# Altium PCB dummy_planes.PcbDoc
Units mm, origin at the board's own origin, x right, y up, seen from the top; angles counter-clockwise.
Board outline 46.99 x 28.07 mm, 4 copper layers (Top Layer, InternalPlane1, InternalPlane2, Bottom Layer); 50 components, 48 nets, 191 pads, 37 vias.
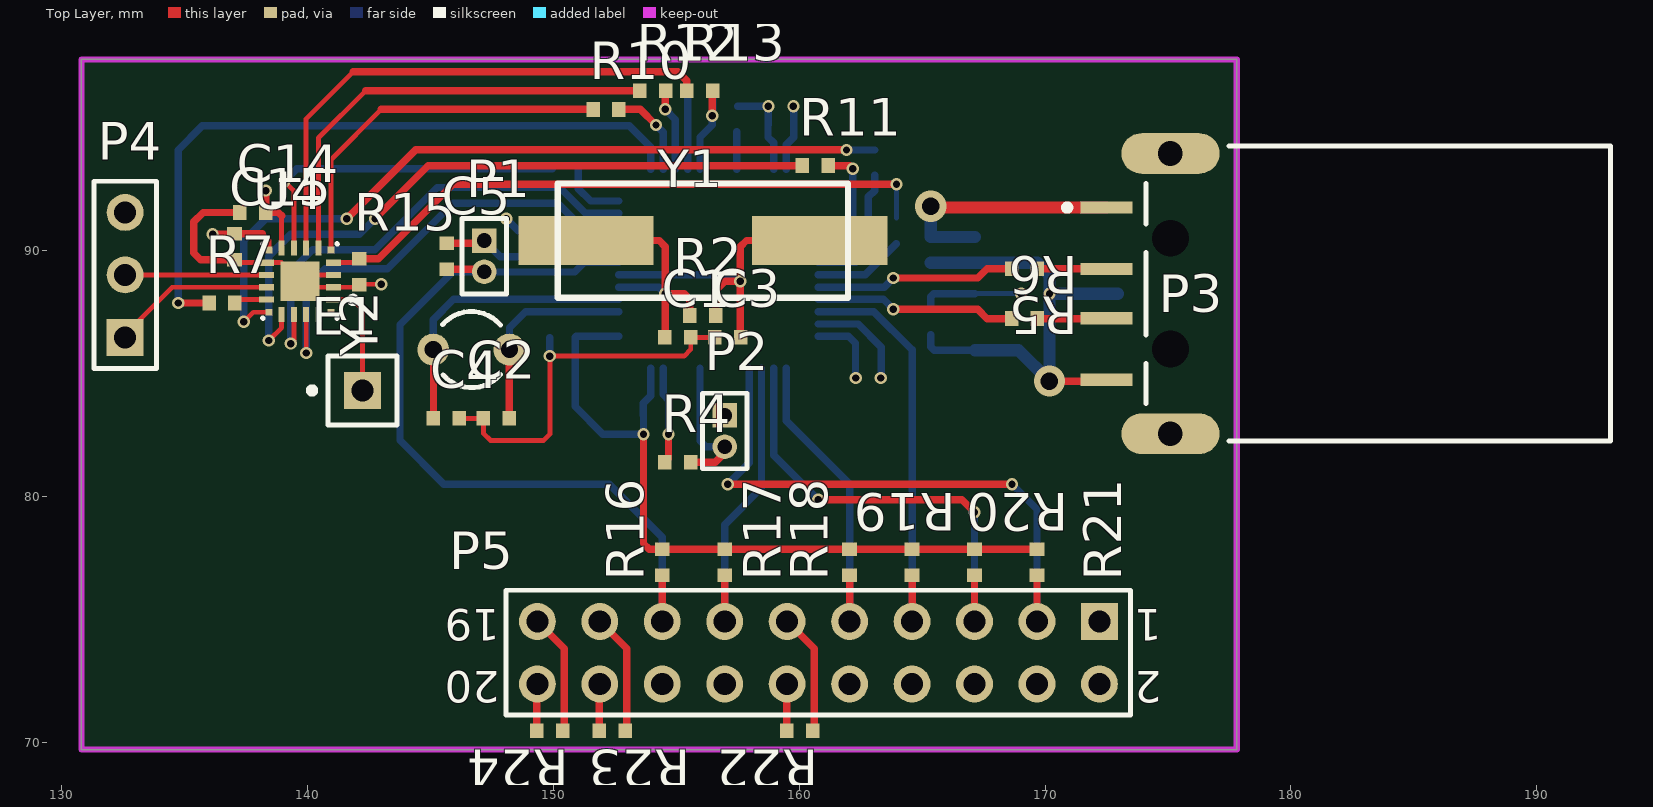
[diagram p0: Top Layer view]
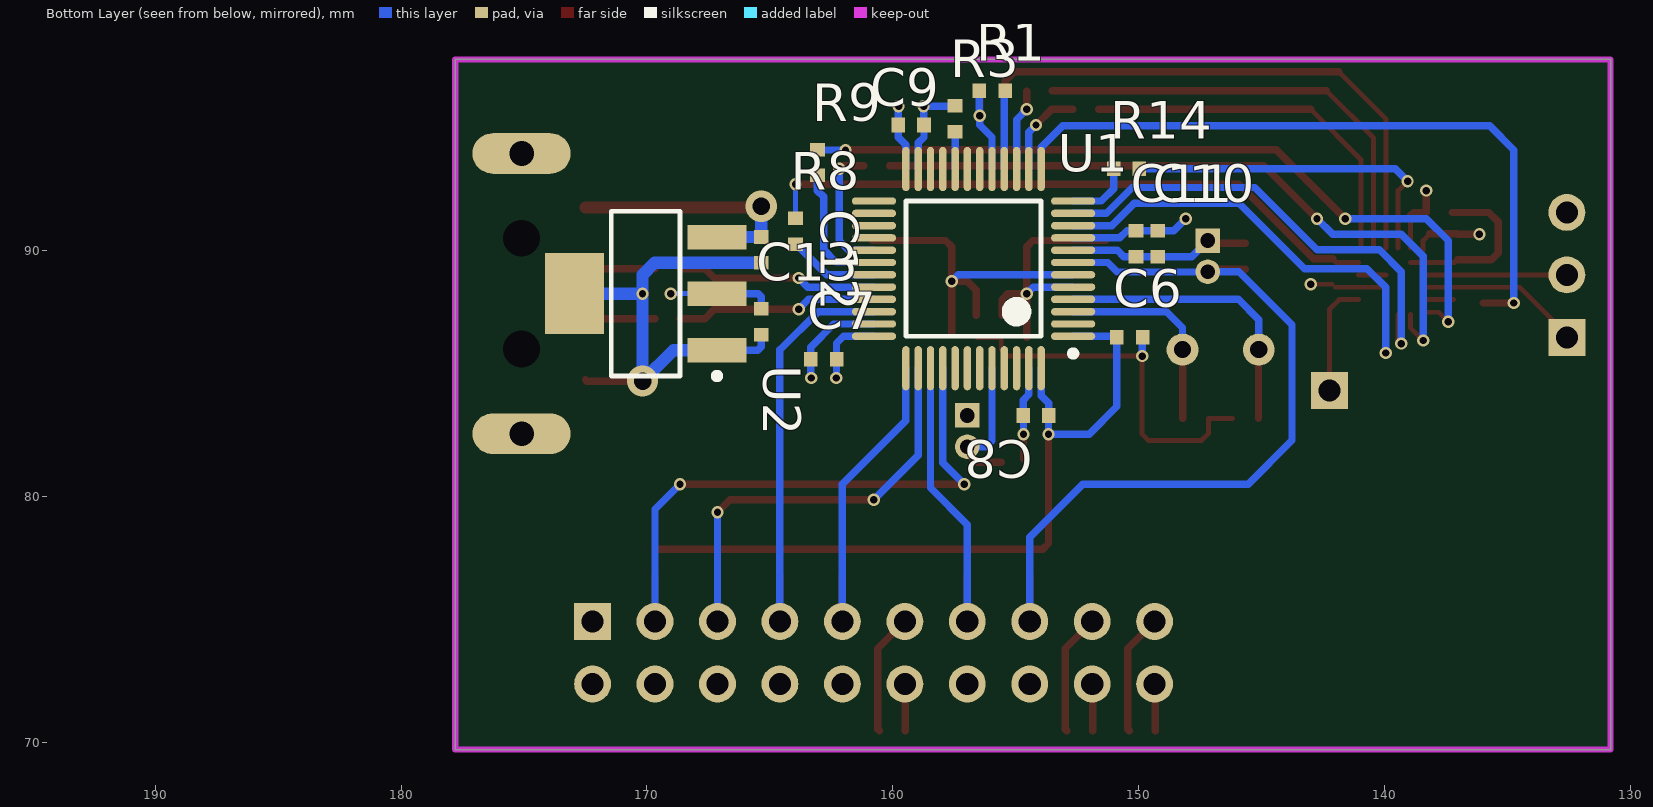
[diagram p1: Bottom Layer view, seen from below]
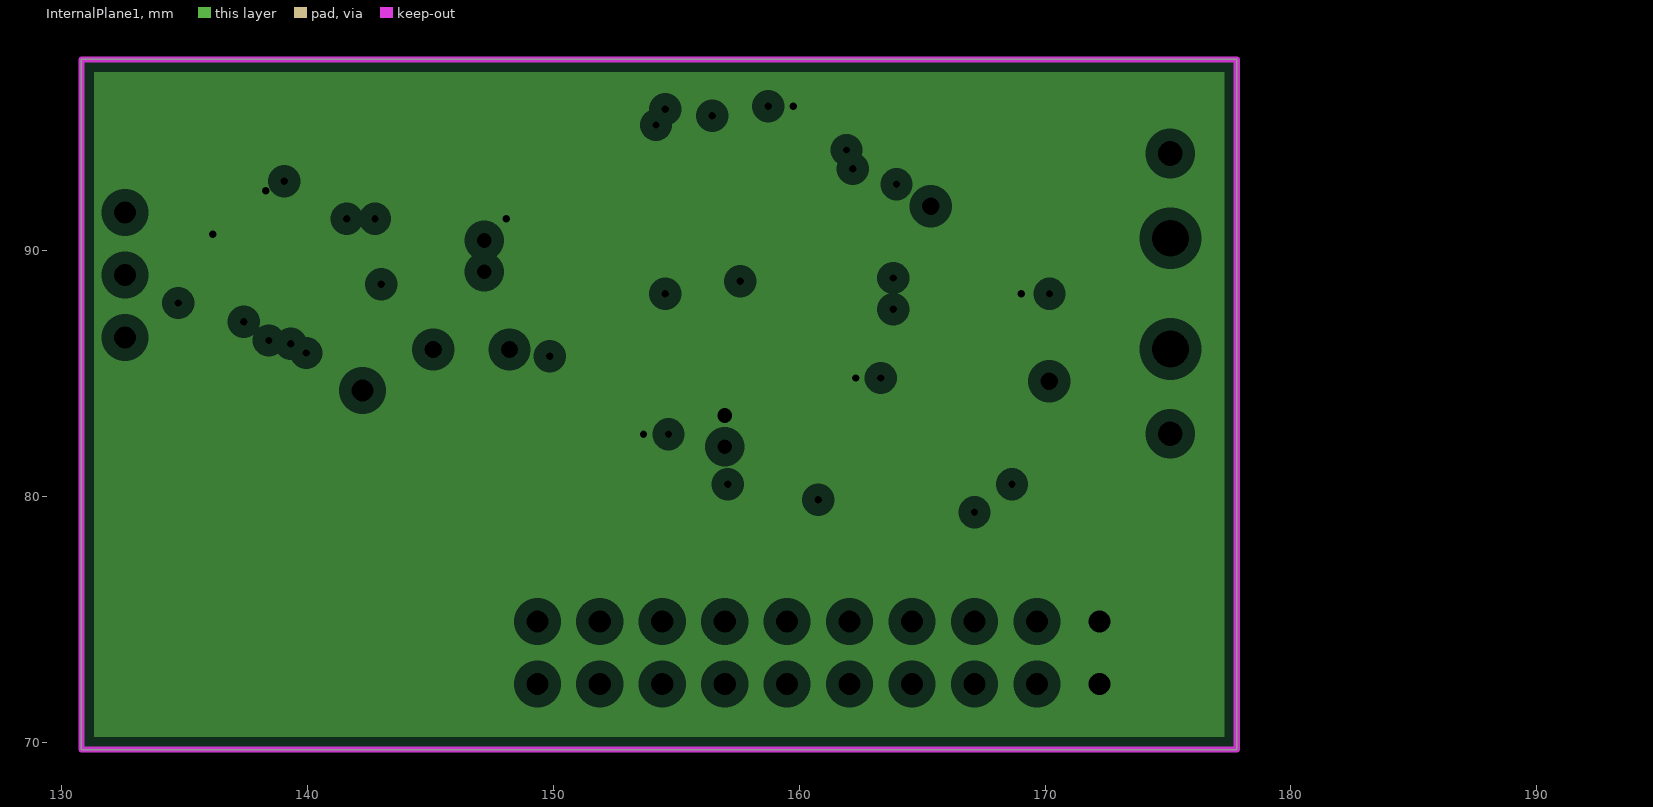
[diagram p2: InternalPlane1, clearances drawn from the general rule]
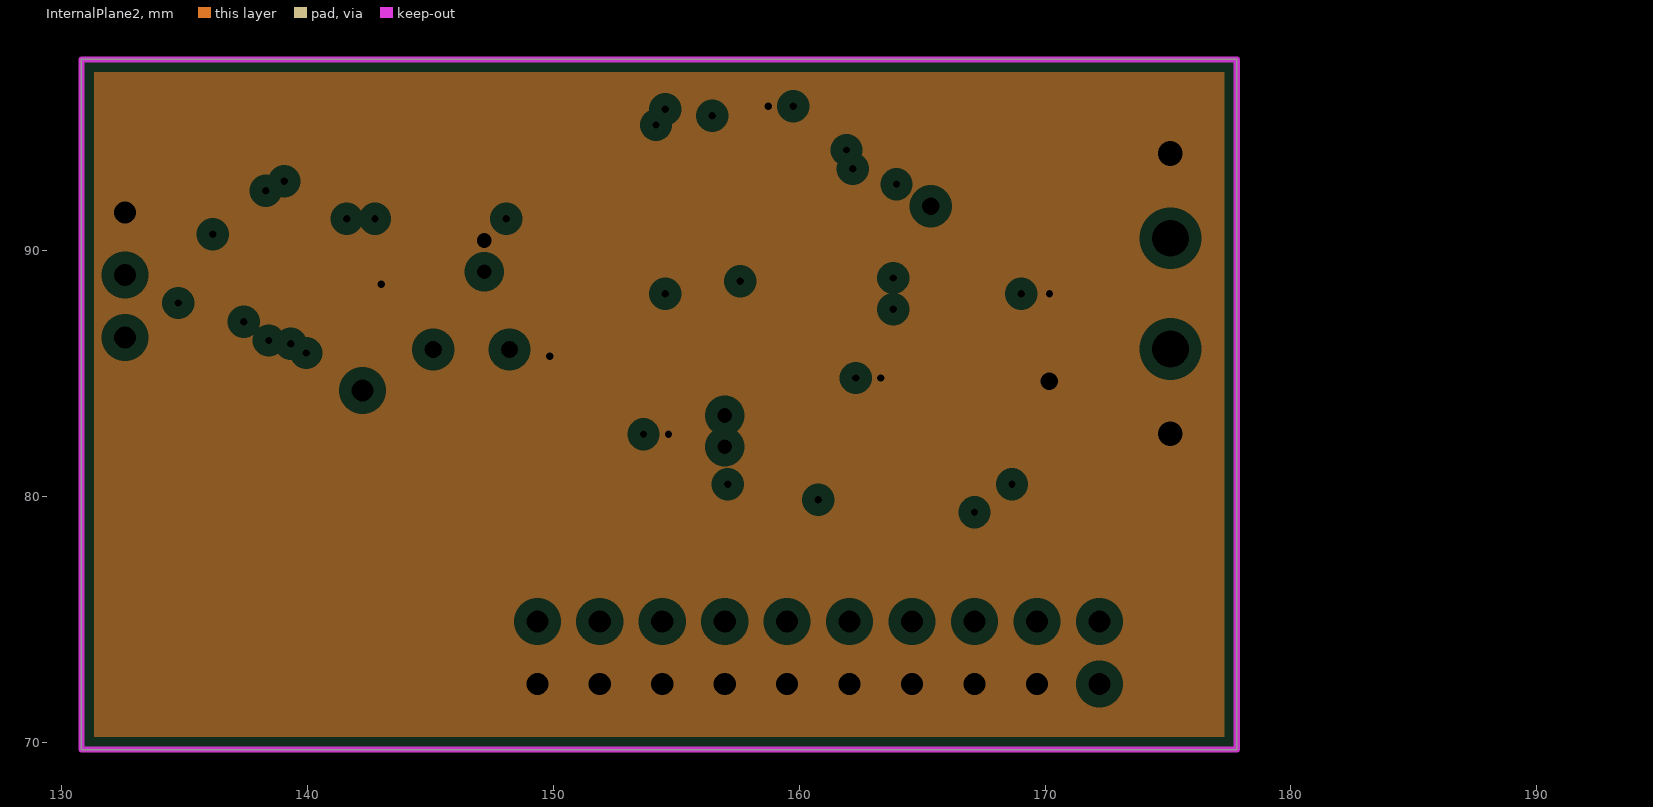
[diagram p3: InternalPlane2, clearances drawn from the general rule]

## Layer stack, top to bottom
Top Layer: signal copper 0.0356
Dielectric: core 0.32, FR-4, Dk 4.8
InternalPlane1: plane copper 0.0356, net +3.3V
Dielectric: prepreg 0.32, FR-4, Dk 4.8
InternalPlane2: plane copper 0.0356, net GND
Dielectric: core 0.32, FR-4, Dk 4.8
Bottom Layer: signal copper 0.0356

## Board outline
130.81,69.723 130.81,97.79 177.8,97.79 177.8,69.723

## Design rules (kind name [scope] priority, off if disabled: settings)
Clearance [All] p1: gap=0.2
DiffPairsRouting [All] p1: maxlimit=0.254 minlimit=0.254 mostfreqgap=0.254 maxuncoupledlength=12.7
PlaneClearance [All] p1: clearance=0.508
PlaneConnect [All] p1: planeconnectstyle=Relief reliefexpansion=0.508 reliefentries=4 reliefconductorwidth=0.3 reliefairgap=0.254
PolygonConnect [All] p1: connectstyle=Relief reliefconductorwidth=0.3 reliefentries=4 polygonreliefangle="90 Angle"
RoutingVias [All] p1: holewidth=0.711 width=1.27 viastyle="Through Hole" minholewidth=0.711 minwidth=1.27 maxholewidth=0.711 maxwidth=1.27
SilkscreenOverComponentPads [All] p1: minsilkscreentomaskgap=0.254
SolderMaskExpansion [All] p1: expansion=0.102
Width [All] p1: maxlimit=0.5 minlimit=0.2 preferedwidth=0.3 minimp=50.000000 maximp=50.000000 favimp=50.000000
24 further rules are at their usual default settings.

## Classes and differential pairs
component class usb_connector: C12 C13 P3 R5 R6 U2
component class jtag_connector: P5 R16 R17 R18 R19 R20 R21 R22 R23 R24
component class hole_field_direct: C14 C15 E1 P4 R7 R8 R9 R10 R11 R12 R13 R14 R15 U4
component class core: C1 C2 C3 C4 C5 C6 C7 C8 C9 C10 C11 P1 P2 R1 R2 R3 R4 U1 Y1 Y2
differential pair USB_D: +USB_D_P -USB_D_N

## Components (designator, comment, footprint, x,y, rotation, side; value= is the part's Value field where it differs from the comment)
C1 "27pF" CHIP0402#1 155.067,86.487 r180 top
C2 "10pF" CHIP0402#1 147.684,83.194 r0 top
C3 "27pF" CHIP0402#1 157.099,86.487 r180 top
C4 "10pF" CHIP0402#1 145.652,83.194 r180 top
C5 "100nF" CHIP0402#1 145.669,89.789 r90 top
C6 "100nF" CHIP0402#1 150.368,86.487 r180 bottom
C7 "100nF" CHIP0402#1 162.814,85.598 r0 bottom
C8 "100nF" CHIP0402#1 154.178,83.312 r0 bottom
C9 "100nF" CHIP0402#1 159.258,95.123 r180 bottom
C10 "100nF" CHIP0402#1 149.225,90.297 r90 bottom
C11 "1uF" CHIP0402#1 150.114,90.297 r90 bottom
C12 "Cap" CHIP0402#2 165.354,90.043 r90 bottom
C13 "Cap" CHIP0402#2 165.354,87.122 r90 bottom
C14 "100nF" CHIP0402#2 137.778,91.567 r180 top
C15 "22nF" CHIP0402#2 137.033,90.17 r90 top
E1 "Antenna" PIN1 142.24,84.328 r90 top
P1 "Reset pins" MHDR1X2 147.193,90.424 r270 top
P2 "Boot pins" MHDR1X2 156.972,83.312 r270 top
P3 "1470695-2" 1470695A 177.8,88.265 r0 top
P4 "Header 3" HDR1X3 132.588,86.487 r90 top
P5 "Header 10X2" HDR2X10 172.212,74.93 r180 top
R1 "47k" CHIP0402#1 155.956,96.52 r180 bottom
R2 "1M" CHIP0402#1 156.083,87.376 r0 top
R3 "47k" CHIP0402#1 157.468,95.382 r90 bottom
R4 "47k" CHIP0402#1 155.067,81.407 r180 top
R5 "Res1" CHIP0402#2 169.164,89.281 r0 top
R6 "Res1" CHIP0402#2 169.164,87.249 r0 top
R7 "600" CHIP0402#2 136.525,87.884 r180 top
R8 "2k" CHIP0402#2 163.957,90.805 r90 bottom
R9 "2k" CHIP0402#2 163.068,93.599 r270 bottom
R10 "2k" CHIP0402#2 152.146,95.758 r180 top
R11 "2k" CHIP0402#2 160.655,93.472 r0 top
R12 "2k" CHIP0402#2 154.051,96.52 r180 top
R13 "2k" CHIP0402#2 155.956,96.52 r180 top
R14 "2k" CHIP0402#2 150.495,93.345 r180 bottom
R15 "47k" CHIP0402#2 142.113,89.154 r90 top
R16 "Res1" CHIP0402#2 154.432,77.343 r90 top
R17 "Res1" CHIP0402#2 156.972,77.343 r90 top
R18 "Res1" CHIP0402#2 162.052,77.343 r90 top
R19 "Res1" CHIP0402#2 164.592,77.343 r90 top
R20 "Res1" CHIP0402#2 167.132,77.343 r90 top
R21 "Res1" CHIP0402#2 169.672,77.343 r90 top
R22 "Res1" CHIP0402#2 160.02,70.485 r0 top
R23 "Res1" CHIP0402#2 152.4,70.485 r0 top
R24 "Res1" CHIP0402#2 149.86,70.485 r0 top
U1 "STM32F103C8T6" LQFP48_N 156.718,89.281 r0 bottom
U2 "LM1117IMP-3.3" MP04A_N 170.053,88.265 r0 bottom
U4 "Si4705" QFN50P300X300X60-20N 139.7,88.773 r180 top
Y1 "8Mhz" HC-49-SMD 156.083,90.424 r180 top
Y2 "32758" R38 146.668,85.988 r90 top

## Footprints (in the part's own frame and the unit in brackets; to place one, negate y for a bottom-side part, rotate by r counter-clockwise, add the part's x,y. Pads: shape width x height; smd on the part's side, far side on the other; paste and mask are expansions set on the pad)
1470695A [mm] "Connector; USB1.1, Type A, SM; 4 Position; Right Angle"
  rect 2.1x0.5 smd: 1(-5.3,3.5) 2(-5.3,1) 3(-5.3,-1) 4(-5.3,-3.5)
  oval 4x1.65 hole 1: 5(-2.7,-5.7) 6(-2.7,5.7)
  round 1.2 hole 1.5 unplated: MH1(-2.7,-2.25) MH2(-2.7,2.25)
  silkscreen extent -7.02,-6 15.2,6
CHIP0402#1 [mm] "Chip Resistor, 2-Leads, Body 1,0x0,5mm, IPC High Density"
  rect 0.55x0.6 smd: 1(0.525,0) 2(-0.525,0)
  body extent -0.5,-0.25 0.5,0.25, height 0.35
CHIP0402#2 [mm] "Chip Resistor, 2-Leads, Body 1,0x0,5mm, IPC High Density"
  rect 0.55x0.6 smd: 1(-0.525,0) 2(0.525,0)
  body extent -0.5,-0.25 0.5,0.25, height 0.35
HC-49-SMD [mm]
  rect 5.5x2 smd: 1(-4.75,0) 2(4.75,0)
  silkscreen extent -5.9,-2.33 5.9,2.33
HDR1X3 [mm] "Connector; Header; 3 Position"
  rect 1.5x1.5 hole 0.9: 1(0,0)
  round 1.5 hole 0.9: 2(2.54,0) 3(5.08,0)
  silkscreen extent -1.27,-1.27 6.35,1.27
HDR2X10 [mm] "Connector; Header; 10x2 Position"
  rect 1.5x1.5 hole 0.9: 1(0,0)
  round 1.5 hole 0.9: 2(0,2.54) 3(2.54,0) 4(2.54,2.54) 5(5.08,0) 6(5.08,2.54) 7(7.62,0) 8(7.62,2.54) 9(10.16,0) 10(10.16,2.54) 11(12.7,0) 12(12.7,2.54) 13(15.24,0) 14(15.24,2.54) 15(17.78,0) 16(17.78,2.54) 17(20.32,0) 18(20.32,2.54) 19(22.86,0) 20(22.86,2.54)
  silkscreen extent -1.27,-1.27 24.13,3.81
LQFP48_N [mm] "Thin QFP, 48-Leads, Body 7x7mm, Pitch 0.5mm, IPC Medium Density"
  oval 1.8x0.3 smd: 1(-4.05,2.75) 2(-4.05,2.25) 3(-4.05,1.75) 4(-4.05,1.25) 5(-4.05,0.75) 6(-4.05,0.25) 7(-4.05,-0.25) 8(-4.05,-0.75) 9(-4.05,-1.25) 10(-4.05,-1.75) 11(-4.05,-2.25) 12(-4.05,-2.75) 25(4.05,-2.75) 26(4.05,-2.25) 27(4.05,-1.75) 28(4.05,-1.25) 29(4.05,-0.75) 30(4.05,-0.25) 31(4.05,0.25) 32(4.05,0.75) 33(4.05,1.25) 34(4.05,1.75) 35(4.05,2.25) 36(4.05,2.75)
  oval 0.3x1.8 smd: 13(-2.75,-4.05) 14(-2.25,-4.05) 15(-1.75,-4.05) 16(-1.25,-4.05) 17(-0.75,-4.05) 18(-0.25,-4.05) 19(0.25,-4.05) 20(0.75,-4.05) 21(1.25,-4.05) 22(1.75,-4.05) 23(2.25,-4.05) 24(2.75,-4.05) 37(2.75,4.05) 38(2.25,4.05) 39(1.75,4.05) 40(1.25,4.05) 41(0.75,4.05) 42(0.25,4.05) 43(-0.25,4.05) 44(-0.75,4.05) 45(-1.25,4.05) 46(-1.75,4.05) 47(-2.25,4.05) 48(-2.75,4.05)
  silkscreen extent -4.17,-2.75 2.75,3.57, body extent -3.5,-3.5 3.5,3.5, height 1.6
MHDR1X2 [mm] "Connector; Header; 2 Position"
  rect 1x1 hole 0.6: 1(0,0)
  round 1 hole 0.6: 2(1.27,0)
  silkscreen extent -0.9,-0.9 2.17,0.9
MP04A_N [mm] "SOT223, 4-Leads, Body 6.5x3.5mm, Pitch 2.3mm, Lead Span 7mm, IPC Medium Density"
  rect 2.4x1 smd: 1(-2.9,2.3) 2(-2.9,0) 3(-2.9,-2.3)
  rect 2.4x3.3 smd: 4(2.9,0)
  silkscreen extent -3.02,-3.35 1.4,3.47, body extent -1.85,-3.35 1.85,3.35, height 1.8
PIN1 [mm] "Generic Antenna; 1 Lead"
  rect 1.5x1.5 hole 0.9: 1(0,0)
  silkscreen extent -1.4,-1.4 1.4,2.17
QFN50P300X300X60-20N [mm] "QFN, 20-Leads, Body 3,0x3,0mm (max), Pitch 0,50mm, IPC Medium Density"
  rect 1.6x1.6 smd: 0(0,0)
  rect 0.28x0.28 smd: 1(-1.265,1.265) 6(-1.265,-1.265) 11(1.265,-1.265) 16(1.265,1.265)
  rect 0.61x0.25 smd: 2(-1.355,0.75) 3(-1.355,0.25) 4(-1.355,-0.25) 5(-1.355,-0.75) 12(1.355,-0.75) 13(1.355,-0.25) 14(1.355,0.25) 15(1.355,0.75)
  rect 0.25x0.61 smd: 7(-0.75,-1.355) 8(-0.25,-1.355) 9(0.25,-1.355) 10(0.75,-1.355) 17(0.75,1.355) 18(0.25,1.355) 19(-0.25,1.355) 20(-0.75,1.355)
  silkscreen extent -2.28,-1.53 1.53,1.53, body extent -1.5,-1.5 1.5,1.5, height 0.6
R38 [mm] "Crystal, Thru-Hole; 2 Leads; Body 3.1 x 8.2 mm (Dia.xH)"
  round 1.3 hole 0.7: 1(0,1.55) 2(0,-1.55)
  silkscreen extent -1.55,-1.19 1.55,1.17

## Part data
C1 C2 C3 C4 C5 C6 C7 C8 C9 C10 C11 C14 C15: library part Cap, "Capacitor"
C12 C13: "Capacitor"
E1: "Generic Antenna"
P1 P2: library part MHDR1X2, "Header, 2-Pin"
P3: "USB 1.1, Right Angle, SMT, A Type, Plug, 4 Position, Natural"
P4: "Header, 3-Pin"
P5: "Header, 10-Pin, Dual row"
R1 R2 R3 R4 R7 R8 R9 R10 R11 R12 R13 R14 R15: library part Res1, "Resistor"
R5 R6 R16 R17 R18 R19 R20 R21 R22 R23 R24: "Resistor"
U1: "STM32 ARM-based 32-bit MCU with 64 Kbytes Flash, 48-pin LQFP, Industrial Temperature"
U2: "800mA Low-Dropout Linear Regulator"
Y1 Y2: library part HC-49-SMD

## Via types
v1: diameter 0.5, hole 0.3, Top Layer to Bottom Layer, 35 vias
v2: diameter 1.27, hole 0.711, Top Layer to Bottom Layer, 2 vias

## Nets (pads, with @x,y where several pads share a name; then routed paths per layer and width w, separated by ;. In a path a pad name is that pad's centre, name@x,y a point inside that pad or via, vN(x,y) a via of type N, cw(c..) or ccw(c..) an arc to the next point about the centre after c; other vN are vias at no path point)
+3.3V: C6.2 C7.2 C8.2 C9.2 C10.1 C11.1 C13.2 C14.1 C15.2 P2.1 P5.1 P5.2 R16.2 R17.2 R18.2 R19.2 R20.2 R21.2 U1.1 U1.9 U1.24 U1.36 U1.48 U2.2 U4.10 U4.11 | length 51.6
  Top Layer w0.2: 138.159,90.695 138.435,90.419 U4.11 ; U4.10 138.95,91.428
  Top Layer w0.3: v1(136.144,90.678) C15.2@137.016,90.678 ; C15.2 138.159,90.695 ; v1(138.303,92.456) C14.1 138.811,91.567 138.95,91.428 ; v1(153.67,82.55) 153.67,78.105 153.907,77.868 R16.2 R17.2 R18.2 R19.2 R20.2 R21.2
  Bottom Layer w0.2: U2.2 v1(169.037,88.265)
  Bottom Layer w0.3: v1(148.082,91.313) 148.573,90.822 C10.1 C11.1 150.478,90.822 150.769,90.531 U1.9 ; C6.2 150.893,83.676 152.019,82.55 v1(153.67,82.55) C8.2@153.67,83.295 ; C6.2@150.937,86.531 U1.1 ; C8.2 153.653,83.803 153.968,84.118 U1.48 ; U1.24 159.468,94.317 159.783,94.632 C9.2 v1@159.783,95.868 ; U1.36 162.008,86.531 162.289,86.25 C7.2 v1@162.289,84.853 ; C13.2 165.354,88.138 165.481,88.265 U2.2
  other v1: 162.306,84.836 159.766,95.885
+5V: C12.2 P3.1 U2.3 | length 10.1
  Top Layer w0.5: v2@165.41,91.765 P3.1
  Bottom Layer w0.5: v2(165.354,91.821) C12.2 U2.3@167.15,90.568
BOOT0: P2.2 R4.2 U1.44 | length 5.8
  Top Layer w0.3: R4.2 156.591,81.407 156.972,81.788 P2.2
  Bottom Layer w0.3: U1.44 155.968,82.284 156.21,82.042 P2.2
BOOT1: R3.2 U1.20 | length 1.5
  Bottom Layer w0.3: U1.20 R3.2
C_AUX1: U1.45
C_AUX2: U1.46
C_AUX3: U1.21
C_AUX4: U1.22
C_RF_DCLK: R11.2 U1.29 | length 5.5
  Top Layer w0.3: R11.2 162.052,93.472 v1(162.179,93.345)
  Bottom Layer w0.3: U1.29 161.786,90.031 162.179,90.424 v1(162.179,93.345)
C_RF_DFS: R9.2 U1.30 | length 5.4
  Bottom Layer w0.3: U1.30 162.302,89.531 162.814,90.043 162.814,92.202 163.068,92.456 R9.2
C_RF_DOUT: R7.2 U1.13 | length 28.3
  Top Layer w0.3: v1(134.747,87.884) R7.2
  Bottom Layer w0.3: v1(134.747,87.884) 134.747,94.107 135.728,95.088 153.093,95.088 153.968,94.213 U1.13
C_RF_GPO1: U1.10 U4.19 | length 18.7
  Top Layer w0.2: U4.19 139.954,87.414 v1(139.954,85.852)
  Bottom Layer w0.3: v1(139.954,85.852) 139.954,88.519 140.716,89.281 143.256,89.281 145.923,91.948 150.186,91.948 151.103,91.031 U1.10
C_RF_GPO2: U1.11 U4.18 | length 19.4
  Top Layer w0.2: v1(139.319,86.233) 139.45,86.364 U4.18
  Bottom Layer w0.3: v1(139.319,86.233) 139.319,89.154 140.208,90.043 142.748,90.043 145.288,92.583 150.258,92.583 151.31,91.531 U1.11
C_RF_RCLK: R14.1 U1.12 | length 3.7
  Bottom Layer w0.3: R14.1 151.02,92.528 151.517,92.031 U1.12 151.682,92.031
C_RF_RESET: R8.1 U1.31 | length 3.7
  Bottom Layer w0.3: U1.31 162.691,89.031 R8.1@163.948,90.288
C_RF_SCLK: R12.1 U1.15 | length 3.3
  Top Layer w0.3: v1(154.559,95.758) R12.1@154.559,96.503
  Bottom Layer w0.3: v1(154.559,95.758) 154.968,95.349 U1.15
C_RF_SDIO: R1.2 R13.1 U1.17 | length 4.4
  Top Layer w0.3: v1(156.464,95.504) R13.1@156.464,96.503
  Bottom Layer w0.3: U1.17 155.968,94.627 156.464,95.123 v1(156.464,95.504) ; v1@156.481,95.521 R1.2
C_RF_SS: R10.1 U1.14 | length 3.7
  Top Layer w0.3: R10.1 153.543,95.758 v1(154.178,95.123)
  Bottom Layer w0.3: v1(154.178,95.123) 154.468,94.833 U1.14
GND: C1.2 C2.2 C3.1 C4.2 C5.1 C6.1 C7.1 C8.1 C9.1 C10.2 C11.2 C12.1 C13.1 C14.2 C15.1 P1.1 P3.4 P3.5 P3.6 P4.3 P5.4 P5.6 P5.8 P5.10 P5.12 P5.14 P5.16 P5.18 P5.20 R3.1 R4.1 R15.1 R22.1 R23.1 R24.1 U1.8 U1.23 U1.35 U1.47 U2.1 U2.4 U4.0 U4.3 U4.4 U4.12 | length 71.8
  Top Layer w0.2: C15.1@137.155,89.523 U4.12 U4.0@138.95,89.523 ; U4.0@139.95,88.523 U4.3 R15.1@142.007,88.523 ; U4.0@139.95,89.023 U4.4 ; R15.1@142.13,88.646 v1(143.002,88.646) ; C4.2 C2.2 147.159,82.584 147.447,82.296 149.606,82.296 149.86,82.55 v1(149.86,85.725) 155.321,85.725 155.592,85.996 C1.2 C3.1
  Top Layer w0.3: C15.1 135.653,89.645 135.382,89.916 135.382,91.186 135.763,91.567 C14.2 ; C5.1 P1.1@147.083,90.314 ; R24.1 P5.20@149.335,72.373 ; R23.1 P5.18@151.875,72.373 ; R4.1@154.686,81.551 v1(154.686,82.55) ; R22.1 P5.12@159.495,72.373 ; v2(170.18,84.709) 172.444,84.709 P3.4
  Bottom Layer w0.3: P1.1 147.845,89.772 C10.2 C11.2 150.605,89.772 150.864,90.031 U1.8 ; v1(149.86,85.725) C6.1@149.86,86.47 ; U1.47 154.468,84.165 154.703,83.93 C8.1 ; v1(154.686,82.55) C8.1@154.686,83.295 ; R3.1@157.49,95.885 v1(158.75,95.885) C9.1@158.75,95.14 ; C9.1 158.733,94.632 158.968,94.397 U1.23 ; U1.35 162.397,87.031 163.339,86.089 C7.1 v1@163.339,84.853 ; C13.1 165.354,86.106 165.495,85.965 U2.1
  Bottom Layer w0.5: C12.1 169.689,89.518 170.18,89.027 v1(170.18,88.265) ; U2.1 168.924,85.965 v2(170.18,84.709) v1(170.18,88.265) ; U2.4 v1(170.18,88.265)
  other v1: 163.322,84.836
NetC2_1: C2.1 U1.3 Y2.2 | length 8.4
  Top Layer w0.3: C2.1 Y2.2@148.209,85.979
  Bottom Layer w0.3: Y2.2 148.218,86.877 148.872,87.531 U1.3
NetC4_1: C4.1 U1.4 Y2.1 | length 11.9
  Top Layer w0.3: C4.1 Y2.1@145.127,85.979
  Bottom Layer w0.3: Y2.1 145.118,87.206 145.943,88.031 U1.4
NetE1_1: E1.1 U4.2 | length 4.6
  Top Layer w0.2: U4.2 141.847,88.023 142.24,87.63 E1.1
NetP3_2: P3.2 R5.2 | length 2.8
  Top Layer w0.3: R5.2 P3.2@172.484,89.281
NetP3_3: P3.3 R6.2 | length 2.8
  Top Layer w0.3: R6.2 P3.3@172.484,87.249
NetP4_1: P4.1 U4.14 | length 6.5
  Top Layer w0.2: P4.1@132.588,86.614 134.497,88.523 U4.14
NetP4_2: P4.2 U4.13 | length 5.8
  Top Layer w0.2: P4.2@132.588,89.023 U4.13
NetP5_11: P5.11 R22.2 | length 4.9
  Top Layer w0.3: P5.11 160.612,73.83 160.612,70.552 R22.2
NetP5_17: P5.17 R23.2 | length 4.9
  Top Layer w0.3: P5.17 152.992,73.83 152.992,70.552 R23.2
NetP5_19: P5.19 R24.2 | length 4.9
  Top Layer w0.3: P5.19 150.452,73.83 150.452,70.552 R24.2
NetR1_1: R1.1 U1.16 | length 3.2
  Bottom Layer w0.3: U1.16 R1.1@155.468,96.483
NetR7_1: R7.1 U4.15 | length 1.2
  Top Layer w0.2: R7.1@137.189,88.023 U4.15
NetR9_1: R9.1 U4.16 | length 31.7
  Top Layer w0.2: v1(137.414,87.122) 137.8,87.508 U4.16
  Top Layer w0.3: v1(141.605,91.313) 144.414,94.122 161.91,94.122 v1(161.925,94.107)
  Bottom Layer w0.3: v1(137.414,87.122) 137.414,90.424 138.303,91.313 v1(141.605,91.313) ; v1(161.925,94.107) R9.1@163.068,94.107
NetR10_2: R10.2 U4.6 | length 15.2
  Top Layer w0.2: U4.6 140.965,93.721 143.002,95.758
  Top Layer w0.3: 143.002,95.758 R10.2
NetR11_1: R11.1 U4.17 | length 27.9
  Top Layer w0.2: v1(138.43,86.36) 138.95,86.88 U4.17
  Top Layer w0.3: v1(142.748,91.313) 144.907,93.472 R11.1
  Bottom Layer w0.3: v1(138.43,86.36) 138.43,89.789 139.319,90.678 142.113,90.678 v1(142.748,91.313)
NetR12_2: R12.2 U4.7 | length 18.3
  Top Layer w0.2: U4.7 140.45,94.603 142.367,96.52
  Top Layer w0.3: 142.367,96.52 R12.2
NetR13_2: R13.2 U4.8 | length 22.1
  Top Layer w0.2: U4.8 139.95,95.373 141.859,97.282
  Top Layer w0.3: 141.859,97.282 155.067,97.282 155.431,96.918 R13.2
NetR14_2: R14.2 U4.9 | length 14
  Top Layer w0.2: v1(139.065,92.837) 139.45,92.452 U4.9
  Bottom Layer w0.3: v1(139.065,92.837) 139.573,93.345 R14.2
OSC_IN: C1.1 R2.2 U1.5 Y1.2 | length 10.8
  Top Layer w0.3: Y1.2 154.305,90.424 154.559,90.17 v1(154.559,88.265) ; C1.1 154.559,86.487 v1(154.559,88.265) ; R2.2 155.558,88.028 155.321,88.265 v1(154.559,88.265)
  Bottom Layer w0.3: U1.5 154.293,88.531 v1(154.559,88.265)
OSC_OUT: C3.2 R2.1 U1.6 Y1.1 | length 14.1
  Top Layer w0.3: R2.1 156.608,88.409 156.972,88.773 v1(157.607,88.773) ; C3.2@157.607,86.614 v1(157.607,88.773) ; Y1.1 157.861,90.424 157.607,90.17 v1(157.607,88.773)
  Bottom Layer w0.3: U1.6 157.349,89.031 v1(157.607,88.773)
RF_RESET: R8.2 R15.2 U4.5 | length 25.6
  Top Layer w0.2: U4.5 141.957,89.523 R15.2
  Top Layer w0.3: R15.2 142.892,89.679 145.923,92.71 v1(163.957,92.71)
  Bottom Layer w0.2: R8.2 v1(163.957,92.71)
RST: C5.2 P1.2 P5.15 R16.1 U1.7 | length 33.5
  Top Layer w0.3: C5.2 P1.2@147.193,89.264 ; P5.15 R16.1
  Bottom Layer w0.3: P1.2 145.923,89.154 143.764,86.995 143.764,82.296 145.542,80.518 152.273,80.518 154.432,78.359 P5.15 ; P1.2@147.447,89.154 147.454,89.147 150.873,89.147 151.257,89.531 U1.7
TCK: P5.9 R18.1 U1.37 | length 13.3
  Top Layer w0.3: P5.9 R18.1
  Bottom Layer w0.3: U1.37 159.468,83.102 162.052,80.518 P5.9
TDI: P5.5 R20.1 U1.38 | length 19
  Top Layer w0.3: v1(160.782,79.883) 166.624,79.883 v1(167.132,79.375) ; P5.5 R20.1
  Bottom Layer w0.3: U1.38 158.968,81.697 v1(160.782,79.883) ; P5.5 v1(167.132,79.375)
TDO: P5.13 R17.1 U1.39 | length 12.8
  Top Layer w0.3: P5.13 R17.1
  Bottom Layer w0.3: P5.13 156.972,78.867 158.468,80.363 U1.39
TMS: P5.7 R19.1 U1.34 | length 17.4
  Top Layer w0.3: P5.7 R19.1
  Bottom Layer w0.3: U1.34 163.04,87.531 164.592,85.979 P5.7
TRST: P5.3 R21.1 U1.40 | length 24.5
  Top Layer w0.3: v1(157.099,80.518) v1(168.656,80.518) ; P5.3 R21.1
  Bottom Layer w0.3: v1(157.099,80.518) 157.968,81.387 U1.40 ; v1(168.656,80.518) 169.672,79.502 P5.3
USB_D_N: R5.1 U1.32 | length 8.2
  Top Layer w0.3: v1(163.83,88.9) 167.259,88.9 167.64,89.281 R5.1
  Bottom Layer w0.3: U1.32 163.461,88.531 v1(163.83,88.9)
USB_D_P: R6.1 U1.33 | length 8.2
  Top Layer w0.3: v1(163.83,87.63) 167.259,87.63 167.64,87.249 R6.1
  Bottom Layer w0.3: U1.33 163.429,88.031 v1(163.83,87.63)
pads on no net: P3.MH1 P3.MH2 U1.2 U1.18 U1.19 U1.25 U1.26 U1.27 U1.28 U1.41 U1.42 U1.43 U4.1 U4.20

## Polygon pours and split planes (outlines as drawn)
+3.3V on InternalPlane1 (split plane): 177.29,70.233 131.32,70.233 131.32,97.28 177.29,97.28
GND on InternalPlane2 (split plane): 177.29,70.233 131.32,70.233 131.32,97.28 177.29,97.28

## Keep-outs
Keep-Out Layer:
  the board outline again, w0.254

## Dimensions
177.8,69.723 to 193,82.265 on Mechanical 1
177.8,97.79 to 193,94.265 on Mechanical 1
130.81,69.723 to 177.8,69.723 on Mechanical 1

## Text inside footprints (layer, text, board x,y; h text height)
P3: Mechanical 1 "PCB Edge" at 178.273,83.092 h0.25 r90
P5: Top Overlay "20" at 147.828,72.898 h1.27 r180; Top Overlay "19" at 147.828,75.438 h1.27 r180; Top Overlay "1" at 174.752,75.438 h1.27 r180; Top Overlay "2" at 174.752,72.898 h1.27 r180